# Altium PCB PCB1.PcbDoc
Units mm, origin at the board's own origin, x right, y up, seen from the top; angles counter-clockwise.
Board outline 343.6 x 238.6 mm, 2 copper layers (Top Layer, Bottom Layer); 168 components, 153 nets, 551 pads, 0 vias.
Unrouted connection lines stored in the file: 365.
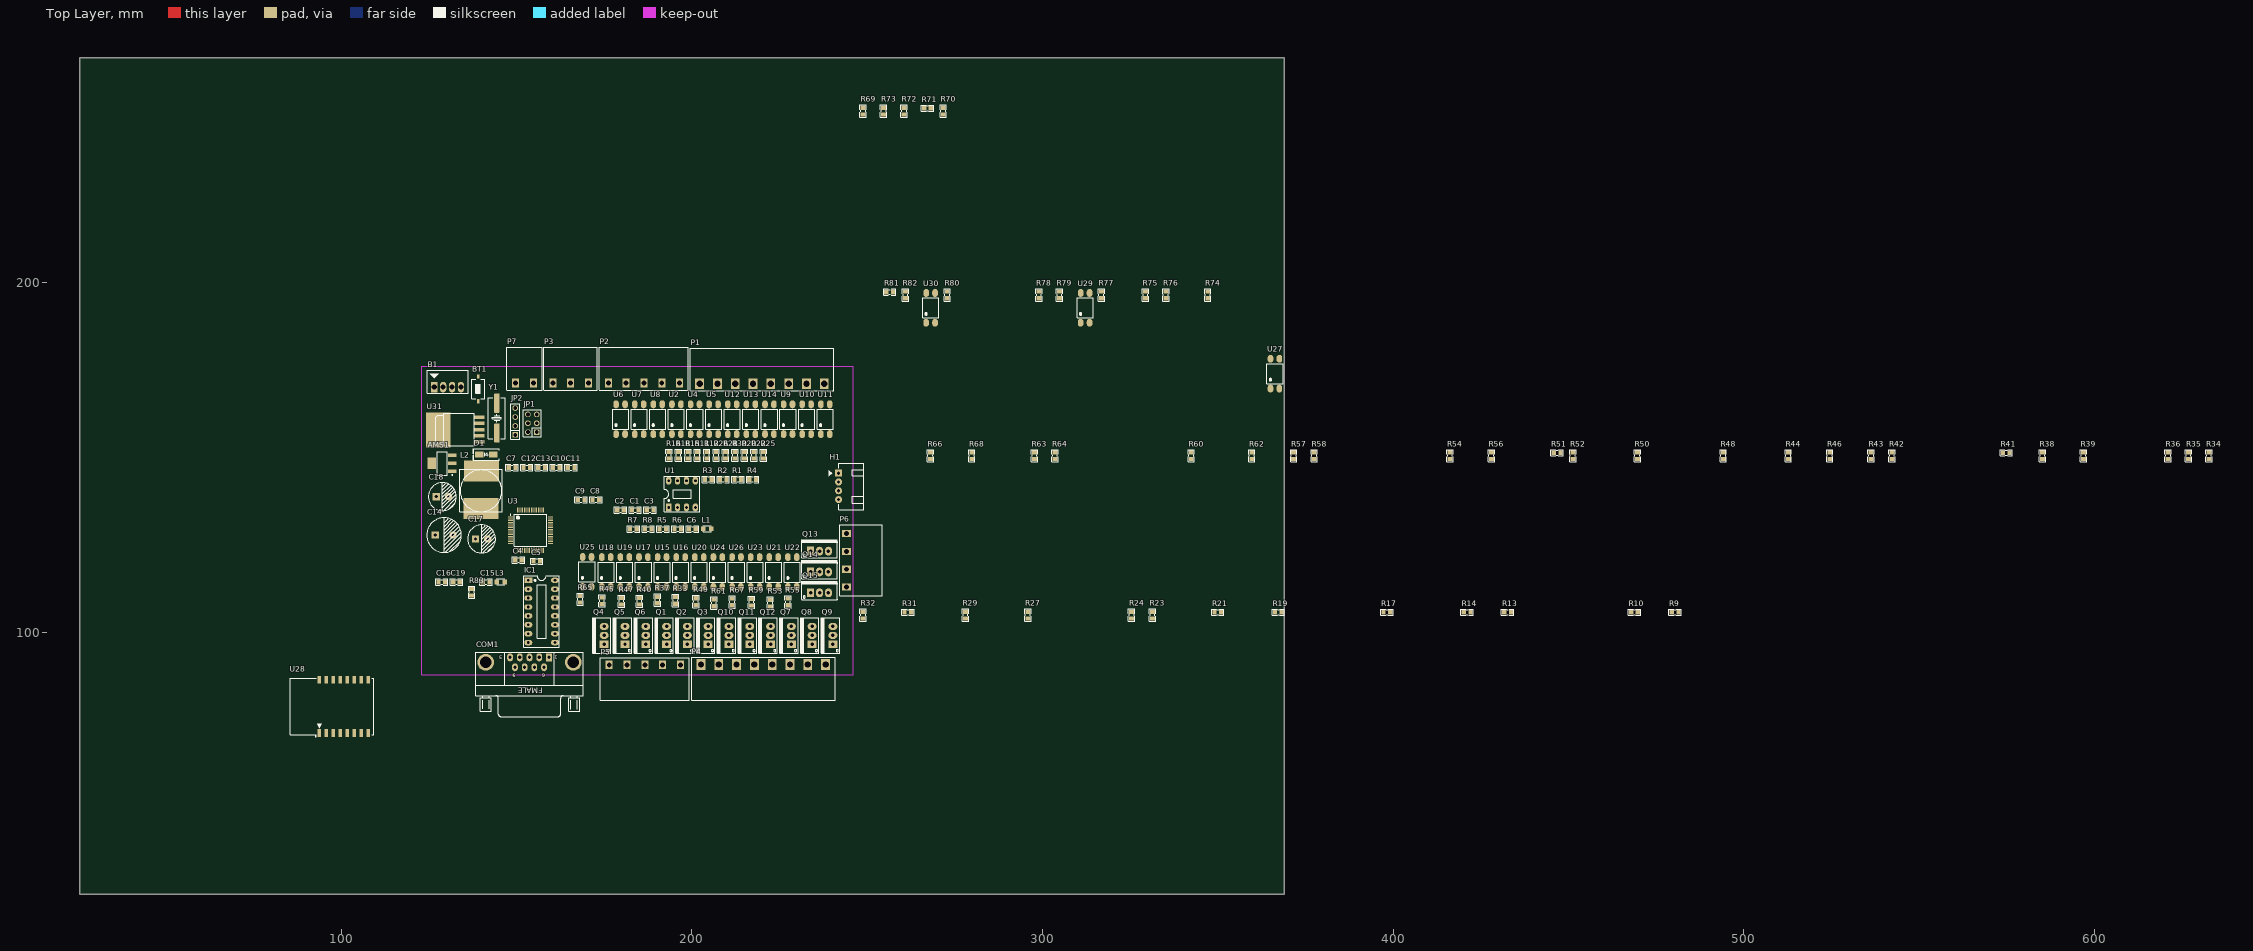
[diagram p0: Top Layer view]
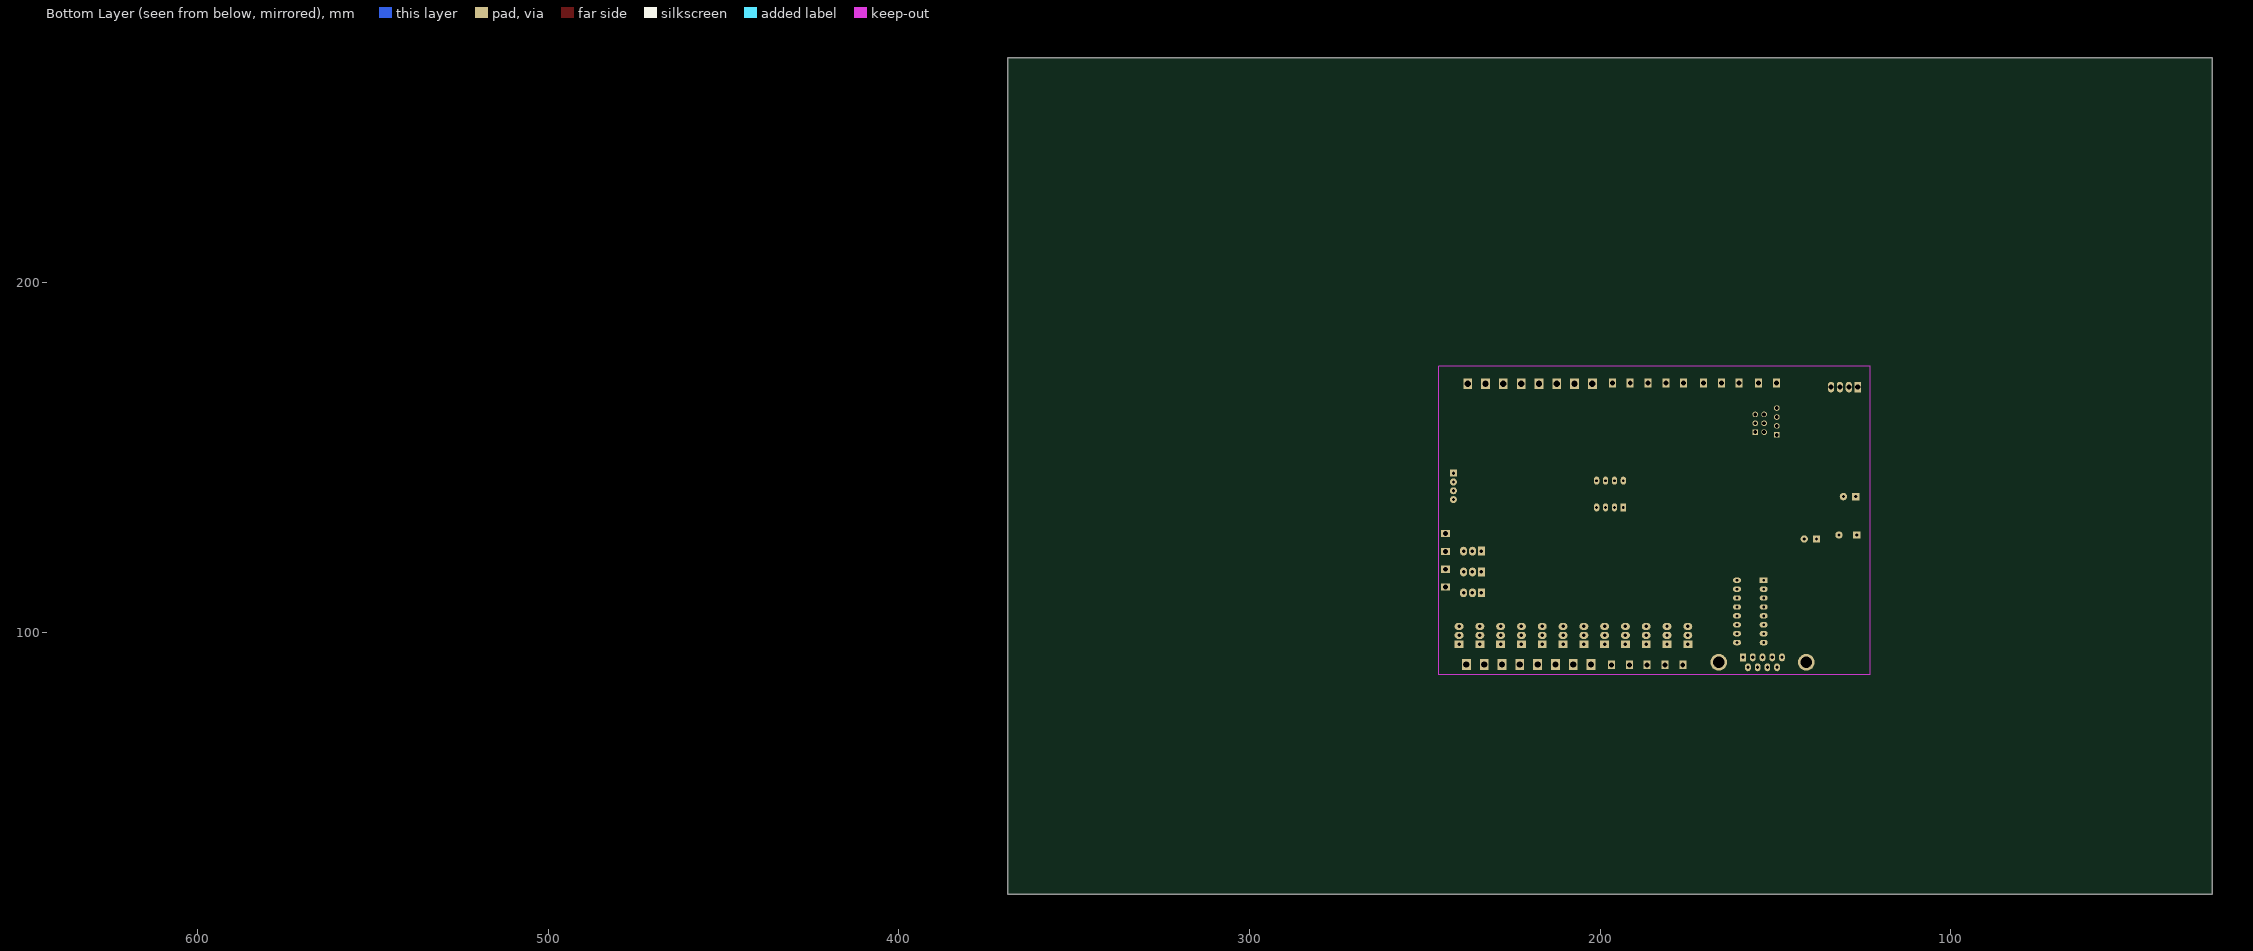
[diagram p1: Bottom Layer view, seen from below]

## Layer stack, top to bottom
Top Solder: solder mask 0.0102, Solder Resist, Dk 3.5
Top Layer: signal copper 0.0356
Dielectric 1: dielectric 0.32, FR-4, Dk 4.8
Bottom Layer: signal copper 0.0356
Bottom Solder: solder mask 0.0102, Solder Resist, Dk 3.5

## Board outline
25.4,25.4 369,25.4 369,264 25.4,264

## Design rules (kind name [scope] priority, off if disabled: settings)
Clearance [All] p1: gap=0.254 ignorepadtopadclearanceinfootprint=FALSE except(0: Arc-Hole Track-Hole SMDPad-Hole THPad-Hole Via-Hole Fill-Hole Poly-Hole Region-Hole Text-Hole)
PolygonConnect [All] p1: connectstyle=Relief reliefconductorwidth=0.254 reliefentries=4 polygonreliefangle="90 Angle" airgapwidth=0.254
RoutingVias [All] p1: holewidth=0.711 width=1.27 viastyle="Through Hole" minholewidth=0.711 minwidth=1.27 maxholewidth=0.711 maxwidth=1.27
SolderMaskExpansion [All] p1: expansion=0.102 istentingtop=FALSE
Width [All] p1: maxlimit=0.254 minlimit=0.254 preferedwidth=0.254
30 further rules are at their usual default settings.

## Classes and differential pairs
component class U_WIFI: R69 R70 R71 R72 R73 U28
component class U_RS485: C6 H1 L1 R1 R2 R3 R4 R5 R6 R7 R8 U1
component class U_RS232: C1 C2 C3 C4 C5 COM1 IC1
component class U_PWM_Output: P6 Q13 Q14 Q15 R74 R75 R76 R77 R78 R79 R80 R81 R82 U27 U29 U30
component class U_Power: AMS1 B1 C14 C15 C16 C17 C18 C19 D1 L2 L3 P7 R83 U31
component class U_D_Output: P4 P5 Q1 Q2 Q3 Q4 Q5 Q6 Q7 Q8 Q9 Q10 Q11 Q12 R33 R34 R35 R36 R37 R38 R39 R40 R41 R42 R43 R44 R45 R46 R47 R48 R49 R50 R51 R52 R53 R54 R55 R56 R57 R58 R59 R60 R61 R62 R63 R64 R65 R66 R67 R68 U15 U16 U17 U18 U19 U20 U21 U22 U23 U24 U25 U26
component class U_D_Input: P1 P2 R9 R10 R11 R12 R13 R14 R15 R16 R17 R18 R19 R20 R21 R22 R23 R24 R25 R26 R27 R28 R29 R30 R31 R32 U2 U4 U5 U6 U7 U8 U9 U10 U11 U12 U13 U14
component class U_A_Input: P3
component class SCH_PLC_Hieu: BT1 C7 C8 C9 C10 C11 C12 C13 JP1 JP2 U3 Y1

## Components (designator, comment, footprint, x,y, rotation, side; value= is the part's Value field where it differs from the comment)
AMS1 "AMS1117-3.3V" SOT223 128.757,148.311 r90 top value="AMS1117-3.3V SOT223"
B1 "B0505S" B0505S 126.517,170.053 r0 top
BT1 "Nut Nhan 2 Chan SMD 3x6x2.5" "Nut Nhan 2 Chan SMD 3x6x2.5" 139.04,169.545 r270 top
C1 "104" "tu 0805" 183.85,135.028 r0 top
C2 "104" "tu 0805" 179.637,135.028 r0 top
C3 "104" "tu 0805" 188.063,135.028 r0 top
C4 "104" "tu 0805" 150.546,120.752 r180 top
C5 "104" "tu 0805" 155.747,120.393 r180 top
C6 "104" "tu 0805" 200.168,129.605 r0 top
C7 "22pF" "tu 0805" 148.695,147.092 r0 top
C8 "104" "tu 0805" 172.613,137.928 r0 top
C9 "104" "tu 0805" 168.399,137.928 r0 top
C10 "104" "tu 0805" 161.335,147.092 r0 top
C11 "104" "tu 0805" 165.548,147.092 r0 top
C12 "104" "tu 0805" 152.909,147.092 r0 top
C13 "22pF" "tu 0805" 157.122,147.092 r0 top
C14 "470uF" "tu hoa 10mm" 129.337,127.864 r0 top
C15 "104" "tu 0805" 141.29,114.461 r0 top
C16 "104" "tu 0805" 128.651,114.461 r0 top
C17 "470uF" "tu hoa 8mm" 140.03,126.746 r0 top
C18 "470uF" "tu hoa 8mm" 128.854,138.811 r0 top
C19 "104" "tu 0805" 132.864,114.461 r0 top
COM1 "COM 9 FMALE" "DSB 9-F" 153.685,91.565 r180 top value="COM 9"
D1 "SS34" "DIODE SMA" 141.351,150.825 r180 top
H1 "Header 4P 2.54 Duc Cong" "Header 4P DC 2.54" 241.884,145.466 r0 top
IC1 "MAX232" DIP16/W0.3 153.34,114.96 r270 top
JP1 "JP 2x3 2.54" "JP 2x3 DT" 154.483,159.741 r90 top
JP2 "JP 1x4 2.54" "JP 1x4 DT" 149.606,156.439 r90 top
L1 "LED 0805" LED-0805-Yellow 203.265,129.654 r0 top
L2 "100uH - 3A SMD" "Cuon Cam 12x12x10" 133.852,134.484 r0 top
L3 "LED 0805" LED-0805-Orange 144.387,114.51 r0 top
P1 "CON 8 EDG5.08" "CON 8 8EDG5.08" 219.989,171.018 r0 top
P2 "CON 5 EDG5.08" "CON 5 5EDG5.08" 176.174,171.247 r0 top
P3 "CON 3 EDG5.08" "CON 3 3EDG5.08" 160.35,171.247 r0 top
P4 "CON 8 EDG5.08" "CON 8 8EDG5.08" 220.37,90.932 r180 top
P5 "CON 5 EDG5.08" "CON 5 5EDG5.08" 196.748,90.83 r180 top
P6 "CON 4 EDG5.08" "CON 4 4EDG5.08" 244.145,128.27 r270 top
P7 "CON 2 EDG5.08" "CON 2 2EDG5.08" 149.733,171.247 r0 top
Q1 "IRFZ44" TO220 192.786,96.71 r90 top
Q2 "IRFZ44" TO220 198.717,96.71 r90 top
Q3 "IRFZ44" TO220 204.648,96.71 r90 top
Q4 "IRFZ44" TO220 174.993,96.71 r90 top
Q5 "IRFZ44" TO220 180.924,96.71 r90 top
Q6 "IRFZ44" TO220 186.855,96.71 r90 top
Q7 "IRFZ44" TO220 228.371,96.71 r90 top
Q8 "IRFZ44" TO220 234.302,96.71 r90 top
Q9 "IRFZ44" TO220 240.233,96.71 r90 top
Q10 "IRFZ44" TO220 210.579,96.71 r90 top
Q11 "IRFZ44" TO220 216.51,96.71 r90 top
Q12 "IRFZ44" TO220 222.44,96.71 r90 top
Q13 "IRFZ44" TO220 233.87,123.253 r0 top
Q14 "IRFZ44" TO220 233.87,117.323 r0 top
Q15 "IRFZ44" TO220 233.87,111.392 r0 top
R1 "10k" "tro smd 0805" 213.133,143.791 r0 top
R2 "10k" "tro smd 0805" 208.925,143.791 r0 top
R3 "10k" "tro smd 0805" 204.717,143.791 r0 top
R4 "10k" "tro smd 0805" 217.341,143.791 r0 top
R5 "20k" "tro smd 0805" 191.749,129.656 r0 top
R6 "120R" "tro smd 0805" 195.957,129.656 r0 top
R7 "20k" "tro smd 0805" 183.333,129.656 r0 top
R8 "1k" "tro smd 0805" 187.541,129.656 r0 top
R9 "10k" "tro smd 0805" 480.441,105.918 r0 top
R10 "10k" "tro smd 0805" 468.884,105.918 r0 top
R11 "10k" "tro smd 0805" 201.615,150.616 r270 top
R12 "10k" "tro smd 0805" 204.309,150.616 r270 top
R13 "10k" "tro smd 0805" 432.689,105.918 r0 top
R14 "10k" "tro smd 0805" 421.132,105.918 r0 top
R15 "10k" "tro smd 0805" 198.921,150.616 r270 top
R16 "10k" "tro smd 0805" 193.533,150.616 r270 top
R17 "10k" "tro smd 0805" 398.272,105.918 r0 top
R18 "10k" "tro smd 0805" 196.227,150.616 r270 top
R19 "10k" "tro smd 0805" 367.284,105.918 r0 top
R20 "10k" "tro smd 0805" 215.085,150.616 r270 top
R21 "10k" "tro smd 0805" 350.012,105.918 r0 top
R22 "10k" "tro smd 0805" 217.78,150.616 r270 top
R23 "10k" "tro smd 0805" 331.343,105.029 r90 top
R24 "10k" "tro smd 0805" 325.374,105.029 r90 top
R25 "10k" "tro smd 0805" 220.474,150.616 r270 top
R26 "10k" "tro smd 0805" 207.003,150.616 r270 top
R27 "10k" "tro smd 0805" 295.783,105.029 r90 top
R28 "10k" "tro smd 0805" 209.697,150.616 r270 top
R29 "10k" "tro smd 0805" 278.003,105.029 r90 top
R30 "10k" "tro smd 0805" 212.391,150.616 r270 top
R31 "10k" "tro smd 0805" 261.62,105.918 r0 top
R32 "10k" "tro smd 0805" 248.793,105.029 r90 top
R33 "680R" "tro smd 0805" 195.291,109.2 r90 top
R34 "10k" "tro smd 0805" 632.714,150.495 r90 top
R35 "10k" "tro smd 0805" 626.872,150.495 r90 top
R36 "10k" "tro smd 0805" 621.03,150.495 r90 top
R37 "680R" "tro smd 0805" 190.144,109.322 r90 top
R38 "100R" "tro smd 0805" 585.216,150.495 r90 top
R39 "100R" "tro smd 0805" 596.9,150.495 r90 top
R40 "680R" "tro smd 0805" 184.988,108.966 r90 top
R41 "100R" "tro smd 0805" 574.929,151.384 r0 top
R42 "10k" "tro smd 0805" 542.29,150.495 r90 top
R43 "10k" "tro smd 0805" 536.321,150.495 r90 top
R44 "10k" "tro smd 0805" 512.699,150.495 r90 top
R45 "680R" "tro smd 0805" 174.31,109.099 r90 top
R46 "100R" "tro smd 0805" 524.51,150.495 r90 top
R47 "680R" "tro smd 0805" 179.873,108.997 r90 top
R48 "100R" "tro smd 0805" 494.157,150.495 r90 top
R49 "680R" "tro smd 0805" 201.133,108.87 r90 top
R50 "100R" "tro smd 0805" 469.646,150.495 r90 top
R51 "10k" "tro smd 0805" 446.786,151.384 r0 top
R52 "10k" "tro smd 0805" 451.231,150.495 r90 top
R53 "680R" "tro smd 0805" 222.316,108.438 r90 top
R54 "100R" "tro smd 0805" 416.179,150.495 r90 top
R55 "680R" "tro smd 0805" 227.345,108.794 r90 top
R56 "100R" "tro smd 0805" 427.99,150.495 r90 top
R57 "10k" "tro smd 0805" 371.602,150.495 r90 top
R58 "10k" "tro smd 0805" 377.444,150.495 r90 top
R59 "680R" "tro smd 0805" 216.957,108.718 r90 top
R60 "100R" "tro smd 0805" 342.392,150.495 r90 top
R61 "680R" "tro smd 0805" 206.35,108.509 r270 top
R62 "100R" "tro smd 0805" 359.664,150.495 r90 top
R63 "10k" "tro smd 0805" 297.688,150.495 r90 top
R64 "10k" "tro smd 0805" 303.53,150.495 r90 top
R65 "680R" "tro smd 0805" 168.113,109.536 r90 top
R66 "100R" "tro smd 0805" 267.97,150.495 r90 top
R67 "680R" "tro smd 0805" 211.445,108.769 r90 top
R68 "100R" "tro smd 0805" 279.781,150.495 r90 top
R69 "10k" "tro smd 0805" 248.793,248.793 r90 top
R70 "10k" "tro smd 0805" 271.653,248.793 r90 top
R71 "10k" "tro smd 0805" 267.208,249.682 r0 top
R72 "10k" "tro smd 0805" 260.477,248.793 r90 top
R73 "10k" "tro smd 0805" 254.635,248.793 r90 top
R74 "10k" "tro smd 0805" 347.091,196.342 r90 top
R75 "680R" "tro smd 0805" 329.311,196.342 r90 top
R76 "100R" "tro smd 0805" 335.153,196.342 r90 top
R77 "10k" "tro smd 0805" 316.738,196.342 r90 top
R78 "680R" "tro smd 0805" 298.958,196.342 r90 top
R79 "100R" "tro smd 0805" 304.8,196.342 r90 top
R80 "10k" "tro smd 0805" 272.796,196.342 r90 top
R81 "680R" "tro smd 0805" 256.413,197.231 r0 top
R82 "100R" "tro smd 0805" 260.858,196.342 r90 top
R83 "220R" "tro smd 0805" 137.125,111.563 r90 top
U1 "max485_smd" DIP8/W0.3 193.38,135.75 r0 top
U2 "OPTO PC817 SMD" SOP4 195.591,160.893 r90 top value=PC817
U3 "STM32F103xx_LQFP64" STM32_LQFP64 153.975,129.235 r0 top
U4 "OPTO PC817 SMD" SOP4 200.899,160.893 r90 top value=PC817
U5 "OPTO PC817 SMD" SOP4 206.207,160.893 r90 top value=PC817
U6 "OPTO PC817 SMD" SOP4 179.667,160.893 r90 top value=PC817
U7 "OPTO PC817 SMD" SOP4 184.975,160.893 r90 top value=PC817
U8 "OPTO PC817 SMD" SOP4 190.283,160.893 r90 top value=PC817
U9 "OPTO PC817 SMD" SOP4 227.439,160.893 r90 top value=PC817
U10 "OPTO PC817 SMD" SOP4 232.747,160.893 r90 top value=PC817
U11 "OPTO PC817 SMD" SOP4 238.055,160.893 r90 top value=PC817
U12 "OPTO PC817 SMD" SOP4 211.515,160.893 r90 top value=PC817
U13 "OPTO PC817 SMD" SOP4 216.823,160.893 r90 top value=PC817
U14 "OPTO PC817 SMD" SOP4 222.131,160.893 r90 top value=PC817
U15 "OPTO PC817 SMD" SOP4 191.501,117.307 r90 top value=PC817
U16 "OPTO PC817 SMD" SOP4 196.809,117.307 r90 top value=PC817
U17 "OPTO PC817 SMD" SOP4 186.193,117.307 r90 top value=PC817
U18 "OPTO PC817 SMD" SOP4 175.577,117.307 r90 top value=PC817
U19 "OPTO PC817 SMD" SOP4 180.885,117.307 r90 top value=PC817
U20 "OPTO PC817 SMD" SOP4 202.117,117.307 r90 top value=PC817
U21 "OPTO PC817 SMD" SOP4 223.349,117.307 r90 top value=PC817
U22 "OPTO PC817 SMD" SOP4 228.657,117.307 r90 top value=PC817
U23 "OPTO PC817 SMD" SOP4 218.041,117.307 r90 top value=PC817
U24 "OPTO PC817 SMD" SOP4 207.425,117.307 r90 top value=PC817
U25 "OPTO PC817 SMD" SOP4 170.104,117.348 r90 top value=PC817
U26 "OPTO PC817 SMD" SOP4 212.733,117.307 r90 top value=PC817
U27 "OPTO PC817 SMD" SOP4 366.319,173.888 r90 top value=PC817
U28 "ESP 07" "ESP8266 07" 93.752,70.964 r90 top
U29 "OPTO PC817 SMD" SOP4 312.166,192.659 r90 top value=PC817
U30 "OPTO PC817 SMD" SOP4 268.097,192.659 r90 top value=PC817
U31 "LM2576HVS 5.0V SMD" TO263-5 133.553,157.963 r90 top
Y1 "8Mhz" "Thach Anh 2 chan SMD" 144.374,161.214 r90 top value=4Mhz

## Footprints (in the part's own frame and the unit in brackets; to place one, negate y for a bottom-side part, rotate by r counter-clockwise, add the part's x,y. Pads: shape width x height; smd on the part's side, far side on the other; paste and mask are expansions set on the pad)
B0505S [mil]
  rect 70x120 hole 57: 1(0,0)
  oval 70x120 hole 57: 2(100,0) 3(200,0) 4(300,0)
  silkscreen extent -80,-70 380,190, body extent -76,-50 376,186, height 394
"CON 2 2EDG5.08" [mm]
  rect 2x2.5 hole 1.4: 1(0,0) 2(5.08,0)
  silkscreen extent -2.54,-2.03 7.62,10.21, body extent -2.5,-1.75 7.58,10.25, height 3.15
"CON 3 3EDG5.08" [mm]
  rect 2x2.5 hole 1.4: 1(0,0) 2(5.08,0) 3(10.173,0)
  silkscreen extent -2.54,-2.03 12.71,10.16, body extent -2.5,-1.75 12.67,10.25, height 3.15
"CON 4 4EDG5.08" [mm]
  rect 2x2.5 hole 1.4: 1(0,0) 1(0,0) 2(5.08,0) 2(5.08,0) 3(10.16,0) 3(10.173,0) 4(15.24,0)
  silkscreen extent -2.54,-2.03 17.78,10.17, body extent -2.5,-1.75 17.74,10.25, height 3.15
"CON 5 5EDG5.08" [mm]
  rect 2x2.5 hole 1.4: 1(0,0) 2(5.08,0) 3(10.16,0) 4(15.24,0) 5(20.32,0)
  silkscreen extent -2.54,-2.03 22.86,10.16, body extent -2.5,-1.75 22.82,10.25, height 3.15
"CON 8 8EDG5.08" [mm]
  rect 2.5x3 hole 1.8: 1(-17.78,0) 2(-12.7,0) 3(-7.62,0) 4(-2.54,0) 5(2.54,0) 6(7.62,0) 7(12.7,0) 8(17.78,0)
  silkscreen extent -20.48,-2.03 20.48,10.16, body extent -20.28,-1.75 20.28,10.25, height 3.15
"Cuon Cam 12x12x10" [mm] "Cuon Cam 12x12x10"
  rect 10x6 smd: 1(6.1,11.6) 2(6,1)
  silkscreen extent 0,0 12.1,12.1, body extent 0.1,-0.2 12.1,12.14, height 7.51
"DIODE SMA" [mm] "SMA"
  rect 2.5x1.7 smd: 1(-2,0) 2(2,0)
  silkscreen extent -3.68,-1.65 3.75,1.65, body extent -2.6,-1.37 2.6,1.37, height 2.4
DIP8/W0.3 [mil] "8 PIN, W 300mil, Pin to pin 100mil"
  rect 60x90 hole 31: 1(0,0)
  oval 60x90 hole 31: 2(100,0) 3(200,0) 4(300,0) 5(300,300) 6(200,300) 7(100,300) 8(0,300)
  silkscreen extent -50,-50 350,350, body extent -50,-40 350,336, height 201
DIP16/W0.3 [mil] "16 PIN, W 300mil, Pin to pin 100mil"
  rect 60x90 hole 31: 1(0,0)
  oval 60x90 hole 31: 2(100,0) 3(200,0) 4(300,0) 5(400,0) 6(500,0) 7(600,0) 8(700,0) 9(700,300) 10(600,300) 11(500,300) 12(400,300) 13(300,300) 14(200,300) 15(100,300) 16(0,300)
  silkscreen extent -50,-50 750,350, body extent -52,-57 752,356, height 299
"DSB 9-F" [mil] "COM FMALE - D Subminiature; 9 Position; Right Angle; Pitch 1.385 mm"
  rect 65x90 hole 35: 1(-218.11,-55.91)
  oval 65x90 hole 35: 2(-109.06,-55.91) 3(0,-55.91) 4(109.05,-55.91) 5(218.11,-55.91) 6(-163.58,55.91) 7(-54.53,55.91) 8(54.53,55.91) 9(163.58,55.91)
  round 187.4 hole 128.35: 10(-491.93,0) 11(491.93,0)
  silkscreen extent -606,-114 606,610, body extent -604,-138 608,613, height 495
"ESP8266 07" [mm] "ESP-12 Wi-Fi Module by AI-Thinker"
  rect 2.25x1 smd: 1(0.375,0) 2(0.375,-2) 3(0.375,-4) 4(0.375,-6) 5(0.375,-8) 6(0.375,-10) 7(0.375,-12) 8(0.375,-14) 9(15.625,-14) 10(15.625,-12) 11(15.625,-10) 12(15.625,-8) 13(15.625,-6) 14(15.625,-4) 15(15.625,-2) 16(15.625,0)
  silkscreen extent -0.7,-15.57 16.08,8.37, body extent 0,-15.49 16,8.51, height 2.75
"Header 4P DC 2.54" [mil]
  rect 78.74x78.74 hole 35: 1(-1,1)
  round 78.74 hole 35: 2(-1,-97.43) 3(-1,-195.85) 4(-1,-294.28)
  silkscreen extent -110,-409 280,115, body extent 5,-413 278,123, height 290
"JP 1x4 DT" [mm] "4 pins, 1 row, straight, gold plating"
  rect 1.6x1.6 hole 1.1: 1(0,0)
  round 1.6 hole 1.1: 2(2.54,0) 3(5.08,0) 4(7.62,0)
  silkscreen extent -1.27,-1.27 8.89,1.27, body extent -1.27,-1.27 8.89,1.27, height 8.54
"JP 2x3 DT" [mm]
  rect 1.6x1.6 hole 1.1: 1(-2.54,-1.27)
  round 1.6 hole 1.1: 2(0,-1.27) 3(2.54,-1.27) 4(2.54,1.27) 5(0,1.27) 6(-2.54,1.27)
  silkscreen extent -3.81,-2.54 3.81,2.54, body extent -3.81,-2.54 3.81,2.54, height 8.55
LED-0805-Orange [mil]
  rect 50x55 smd: 1(0,0) 2(90,0)
  silkscreen extent 0,-35 90,35, body extent 5,-25 85,25, height 43
LED-0805-Yellow [mil]
  rect 50x55 smd: 1(0,0) 2(90,0)
  silkscreen extent 0,-35 90,35, body extent 5,-25 85,25, height 43
"Nut Nhan 2 Chan SMD 3x6x2.5" [mm] "Switch SMD type"
  rect 1.2x0.8 smd: 1(-3.5,0) 2(3.5,0)
  silkscreen extent -2.82,-1.85 2.82,1.85, body extent -3.05,-1.85 3.05,1.85, height 2.5
SOP4 [mm]
  oval 2.25x1.6 smd: 1(-4.25,1.27) 2(-4.25,-1.27) 3(4.25,-1.27) 4(4.25,1.27)
  silkscreen extent -2.85,-2.3 2.85,2.3, body extent -4.67,-2.29 4.93,2.31, height 3.6
SOT223 [mm]
  rect 1x2.4 smd: 1(-2.3,-2.9) 2(0,-2.9) 3(2.3,-2.9)
  rect 3.3x2.4 smd: 4(0,2.9)
  silkscreen extent -3.47,-3.03 3.35,1.4, body extent -3.25,-3.56 3.25,3.4, height 1.68
STM32_LQFP64 [mm] "TSQFP, 64-Leads, Body 10.00x10.00mm, Pitch 0.50mm, IPC Medium Density"
  oval 1.45x0.3 smd: 1(-5.725,3.75) 2(-5.725,3.25) 3(-5.725,2.75) 4(-5.725,2.25) 5(-5.725,1.75) 6(-5.725,1.25) 7(-5.725,0.75) 8(-5.725,0.25) 9(-5.725,-0.25) 10(-5.725,-0.75) 11(-5.725,-1.25) 12(-5.725,-1.75) 13(-5.725,-2.25) 14(-5.725,-2.75) 15(-5.725,-3.25) 16(-5.725,-3.75) 33(5.725,-3.75) 34(5.725,-3.25) 35(5.725,-2.75) 36(5.725,-2.25) 37(5.725,-1.75) 38(5.725,-1.25) 39(5.725,-0.75) 40(5.725,-0.25) 41(5.725,0.25) 42(5.725,0.75) 43(5.725,1.25) 44(5.725,1.75) 45(5.725,2.25) 46(5.725,2.75) 47(5.725,3.25) 48(5.725,3.75)
  oval 0.3x1.45 smd: 17(-3.75,-5.725) 18(-3.25,-5.725) 19(-2.75,-5.725) 20(-2.25,-5.725) 21(-1.75,-5.725) 22(-1.25,-5.725) 23(-0.75,-5.725) 24(-0.25,-5.725) 25(0.25,-5.725) 26(0.75,-5.725) 27(1.25,-5.725) 28(1.75,-5.725) 29(2.25,-5.725) 30(2.75,-5.725) 31(3.25,-5.725) 32(3.75,-5.725) 49(3.75,5.725) 50(3.25,5.725) 51(2.75,5.725) 52(2.25,5.725) 53(1.75,5.725) 54(1.25,5.725) 55(0.75,5.725) 56(0.25,5.725) 57(-0.25,5.725) 58(-0.75,5.725) 59(-1.25,5.725) 60(-1.75,5.725) 61(-2.25,5.725) 62(-2.75,5.725) 63(-3.25,5.725) 64(-3.75,5.725)
  silkscreen extent -5.85,-4.6 4.6,4.6, body extent -6,-6 6,6, height 1.6
"Thach Anh 2 chan SMD" [mm] "SMD Crystal HC49/US-SM package"
  round 0.508 on Mech15: 0(0,0)
  rrect25% 5.5x1.5 smd: 1(-4.25,0) 2(4.25,0)
  silkscreen extent -5.84,-2.41 5.84,2.41, body extent -6.4,-2.41 6.4,2.42, height 4.29
TO220 [mil] "TO-220"
  rect 80x100 hole 39: 1(0,0)
  oval 80x100 hole 39: 2(100,0) 3(200,0)
  silkscreen extent -100,-76 300,130, body extent -95,-80 295,97, height 323
TO263-5 [mil] "TO263-5"
  rect 39.37x120 smd: 1(-140,-230) 2(-70,-230) 3(0,-230) 4(70,-230) 5(140,-230)
  rect 393.7x275.59 smd: 6(-5,230)
  silkscreen extent -180,-170 180,260, body extent -200,-242 200,310, height 180
"tro smd 0805" [mm]
  rect 1.2x1.4 smd: 1(-0.946,-0.061) 2(0.954,-0.061)
  silkscreen extent -1.75,-0.97 1.75,0.84, body extent -1.56,-0.76 1.44,0.64, height 0.53
"tu 0805" [mm] "Compoment SMD 80x50mil"
  rect 1.2x1.4 smd: 1(-0.946,-0.003) 2(0.954,-0.003)
  silkscreen extent -1.75,-0.89 1.75,0.89, body extent -1.01,-0.64 1.01,0.63, height 0.61
"tu hoa 8mm" [mm]
  rect 2.1x2.1 hole 0.9: 1(-1.75,0)
  round 2.1 hole 0.9: 2(1.75,0)
  silkscreen extent -4,-4 4,4, body extent -4.1,-4.07 4.1,4.13, height 13.81
"tu hoa 10mm" [mm]
  rect 2.1x2.1 hole 0.9: 1(-2.54,0)
  round 2.1 hole 0.9: 2(2.54,0)
  silkscreen extent -4.95,-4.96 4.93,4.92, body extent -5,-5 4.97,5, height 20.01

## Part data
AMS1: library part "AMS1117 SMD", "Dán", Chung_Loai=Dán, Don_Vi=Con, Ma_Hang=MH000596
B1 H1 P1 P2 P3 P4 P5 P6 P7: "Cắm", Chung_Loai=Cắm, Don_Vi=Con
  B1: Ma_Hang=MH003143, Ten_Linh_Kien="B0505S-1W SIP4 IC Converter DC-DC"
  H1: Ma_Hang=MH001310, Ten_Linh_Kien="Header 4P XH2.54-4P Đực Cong"
  P1 P4: Ma_Hang=MH000978, Ten_Linh_Kien="CON 8 2EDG5.08-8P 5.08MM ( Xanh Cong)"
  P2 P5: Ma_Hang=MH003589, Ten_Linh_Kien="CON 5 2EDG5.08-5P 5.08MM ( Xanh Cong)"
  P3: Ma_Hang=MH000760, Ten_Linh_Kien="CON 3 2EDG5.08-3P 5.08MM ( Xanh Cong)"
  P6: Ma_Hang=MH000979, Ten_Linh_Kien="CON 4 2EDG5.08-4P 5.08MM ( Xanh Cong)"
  P7: Ma_Hang=MH000759, Ten_Linh_Kien="CON 2 2EDG5.08-2P 5.08MM ( Xanh Cong)"
C1 C2 C3 C4 C5 C6 C8 C9 C10 C11 C12 C15 C16 C19: library part "Tu 0805 104 50V 10%", "Dán", Chung_Loai=Dán, Don_Vi=Con, Ma_Hang=MH004551, So_Chan=2, Ten_Linh_Kien="Tụ 0805 104-100nF 10% 50V"
C7 C13: library part "Tu 0805 22pF 50V 10%", "Dán", Chung_Loai=Dán, Don_Vi=Con, Ma_Hang=MH004560, So_Chan=2, Ten_Linh_Kien="Tụ 0805 22P 10% 50V"
C14: library part "Tu Hoa 470uF 50V 10x17", "Cắm", Chung_Loai=Cắm, Don_Vi=Con, Ma_Hang=MH006866, So_Chan=2, Ten_Linh_Kien="Tụ Hóa 470uF 50V"
C17 C18: library part "Tu Hoa 470uF 16V 8x11", "Cắm", Chung_Loai=Cắm, Don_Vi=Con, Ma_Hang=MH006550, So_Chan=2, Ten_Linh_Kien="Tụ Hóa 470uF 16V 8x11MM"
COM1: library part DSB9F, "COM 9", PackageDocument=O, DatasheetDocument=1-Sep-1999, Gender=Receptacle, LatestRevisionDate=17-Jul-2002, LatestRevisionNote="Re-released for DXP Platform.", Orientation="Right Angle", PackageReference=788750, Positions=9, Published=15-Jun-2001, Publisher="Altium Limited"
D1: library part "Diode SS34 ( 1N5822 )", "Dán", Chung_Loai=Dán, Don_Vi=Con, Ma_Hang=MH002104, Ten_Linh_Kien="Diode SS34 3A 40V SMA ( 1N5822 SS34A)"
IC1: "Dual EIA-232 Driver/Receiver"
JP1: library part "JP 2x3 2.54 Duc Thang", "Cắm", Chung_Loai=Cắm, Don_Vi=Con, Ma_Hang=MH002686, Ten_Linh_Kien="Jump Đôi Đực 2.54MM 2x40P Thẳng 11MM"
JP2: library part "JP 1x4 2.54 Duc Thang", "Cắm", Chung_Loai=Cắm, Don_Vi=Con, Ma_Hang=MH000903, Ten_Linh_Kien="Jump Đơn Đực 2.54MM 1x40P Thẳng 11MM"
L1: library part "LED 0805 Vang", "Dán", Chung_Loai=Dán, Don_Vi=Con, Ma_Hang=MH002329, Ten_Linh_Kien="LED 0805 Màu Vàng ( Yellow)"
L2: library part "CUON CAM 100uH SMD", "Dán", Chung_Loai=Dán, Don_Vi=Con, Ten_Linh_Kien="Cuộn Cảm 100uH 7x7x4MM CD74"
L3: library part "LED 0805 Cam", "Dán", Chung_Loai=Dán, Don_Vi=Con, Ma_Hang=MH002328, Ten_Linh_Kien="LED 0805 Màu Cam ( Orange)"
Q1 Q2 Q3 Q4 Q5 Q6 Q7 Q8 Q9 Q10 Q11 Q12 Q13 Q14 Q15: library part "IRFZ44 DIP", "N-Channel Power MOSFET"
R1 R2 R3 R4 R9 R10 R11 R12 R13 R14 R15 R16 R17 R18 R19 R20 R21 R22 R23 R24 R25 R26 R27 R28 R29 R30 R31 R32 R34 R35 R36 R42 R43 R44 R51 R52 R57 R58 R63 R64 R69 R70 R71 R72 R73 R74 R77 R80: library part "Tro 0805 1% 10k", "Dán", Chung_Loai=Dán, Don_Vi=Con, Ma_Hang=MH005473, So_Chan=2, Ten_Linh_Kien="Trở 0805 1% 10k"
R5 R7: library part "Tro 0805 5% 20k", "Dán", Chung_Loai=Dán, Don_Vi=Con, Ma_Hang=MH005247, So_Chan=2, Ten_Linh_Kien="Trở 0805 5% 20k"
R6: library part "Tro 0805 5% 120R", "Dán", Chung_Loai=Dán, Don_Vi=Con, Ma_Hang=MH005253, So_Chan=2, Ten_Linh_Kien="Trở 0805 5% 120R"
R8: library part "Tro 0805 1% 1k", "Dán", Chung_Loai=Dán, Don_Vi=Con, Ma_Hang=MH005468, So_Chan=2, Ten_Linh_Kien="Trở 0805 1% 1k"
R33 R37 R40 R45 R47 R49 R53 R55 R59 R61 R65 R67 R75 R78 R81: library part "Tro 0805 1% 680R", "Dán", Chung_Loai=Dán, Don_Vi=Con, Ma_Hang=MH005487, So_Chan=2, Ten_Linh_Kien="Trở 0805 1% 680R"
R38 R39 R41 R46 R48 R50 R54 R56 R60 R62 R66 R68 R76 R79 R82: library part "Tro 0805 5% 100R", "Dán", Chung_Loai=Dán, Don_Vi=Con, Ma_Hang=MH005251, So_Chan=2, Ten_Linh_Kien="Trở 0805 5% 100R"
R83: library part "Tro 0805 5% 220R", "Dán", Chung_Loai=Dán, Don_Vi=Con, Ma_Hang=MH005259, So_Chan=2, Ten_Linh_Kien="Trở 0805 5% 220R"
U2 U4 U5 U6 U7 U8 U9 U10 U11 U12 U13 U14 U15 U16 U17 U18 U19 U20 U21 U22 U23 U24 U25 U26 U27 U29 U30: "Single Opto"
U28: library part "ESP8266 07", "ESP8266 07 16 Pin", IC=ESP8266-EX, Vendor=Ai-thinker
U31: "Dán", Chung_Loai=Dán, Don_Vi=Con, Ma_Hang=MH002362, Ten_Linh_Kien="LM2576HVS-5.0V BUCK 5V 3A TO263-5"
Y1: library part "Thach Anh 2 chan SMD", "Crystal For all Crystal 2pin."
BT1: Ma_Hang=MH001036, Ten="Nút Nhấn 2 Chân 3x6x2.5MM SMD"

## Nets (pads, with @x,y where several pads share a name; then routed paths per layer and width w, separated by ;. In a path a pad name is that pad's centre, name@x,y a point inside that pad or via, vN(x,y) a via of type N, cw(c..) or ccw(c..) an arc to the next point about the centre after c; other vN are vias at no path point)
3.3V: C3.1 C9.2 C10.2 C11.1 C12.2 IC1.16 JP1.1 JP1.6 JP2.4 P2.5 R9.2 R10.2 R13.2 R14.2 R17.2 R19.2 R21.2 R23.2 R24.2 R27.2 R29.2 R31.2 R69.1 R70.2 R72.2 R73.2 U3.13 U3.19 U3.32 U3.48 U3.64 U28.8
5V: AMS1.3 B1.2 C16.1 C17.1 L2.2 U31.4
5V_CL: B1.4 C6.2 H1.1 P5.5 R1.2 R2.2 R3.2 R4.2 R7.2 R8.2 R34.1 R35.1 R36.1 R42.1 R43.1 R44.1 R51.1 R52.1 R57.1 R58.1 R63.1 R64.1 U1.8
24V: C14.1 C15.2 P6.4 P7.1 R74.1 R77.1 R80.1 U31.1
AI1: P3.3 U3.8
AI2: P3.2 U3.9
AI3: P3.1 U3.10
BOOT0: JP1.5 U3.60
BOOT1: JP1.2 U3.28
COM_RX: COM1.2 IC1.13
COM_TX: COM1.3 IC1.14
D_IN1: R9.1 U2.4 U3.30
D_IN2: R13.1 U3.29 U5.4
D_IN3: R17.1 U3.27 U7.4
D_IN4: R21.1 U3.26 U9.4
D_IN5: R27.1 U3.25 U12.4
D_IN6: R31.1 U3.24 U14.4
D_IN7: R10.1 U3.23 U4.4
D_IN8: R14.1 U3.22 U6.4
D_IN9: R19.1 U3.21 U8.4
D_IN10: R24.1 U3.20 U11.4
D_IN11: R23.1 U3.15 U10.4
D_IN12: R29.1 U3.14 U13.4
D_OUT1: R33.1 U3.45
D_OUT2: R45.1 U3.44
D_OUT3: R55.1 U3.43
D_OUT4: R61.1 U3.42
D_OUT5: R67.1 U3.41
D_OUT6: R40.1 U3.40
D_OUT7: R47.1 U3.39
D_OUT8: R53.1 U3.38
D_OUT9: R59.1 U3.37
D_OUT10: R65.1 U3.36
D_OUT11: R37.1 U3.35
D_OUT12: R49.1 U3.34
DE: R2.1 R3.1 U1.2 U1.3 U3.55
DI1: P1.1 U2.1
DI2: P1.2 U5.1
DI3: P1.3 U7.1
DI4: P1.4 U9.1
DI5: P1.5 U12.1
DI6: P1.6 U14.1
DI7: P1.7 U4.1
DI8: P1.8 U6.1
DI9: P2.1 U8.1
DI10: P2.2 U11.1
DI11: P2.3 U10.1
DI12: P2.4 U13.1
DO1: P4.1 Q1.2
DO2: P4.2 Q4.2
DO3: P4.3 Q8.2
DO4: P4.4 Q10.2
DO5: P4.5 Q12.2
DO6: P4.6 Q3.2
DO7: P4.7 Q5.2
DO8: P4.8 Q7.2
DO9: P5.1 Q9.2
DO10: P5.2 Q11.2
DO11: P5.3 Q2.2
DO12: P5.4 Q6.2
EN: R72.1 U28.3
ESP_NRST: R69.2 U28.1
GND: AMS1.1 B1.1 BT1.1 C3.2 C4.2 C5.2 C6.1 C7.1 C8.2 C9.1 C10.1 C11.2 C12.1 C13.1 C14.2 C15.1 C16.2 C17.2 C18.2 C19.2 COM1.5 D1.1 H1.4 IC1.15 JP1.3 JP1.4 JP2.2 L1.2 L3.2 P7.2 R5.2 R71.1 U1.5 U2.3 U3.12 U3.18 U3.31 U3.47 U3.63 U4.3 U5.3 U6.3 U7.3 U8.3 U9.3 U10.3 U11.3 U12.3 U13.3 U14.3 U15.2 U16.2 U17.2 U18.2 U19.2 U20.2 U21.2 U22.2 U23.2 U24.2 U25.2 U26.2 U27.2 U28.9 U29.2 U30.2 U31.3 U31.5 U31.6
GND_CL: B1.3 Q1.3 Q2.3 Q3.3 Q4.3 Q5.3 Q6.3 Q7.3 Q8.3 Q9.3 Q10.3 Q11.3 Q12.3 Q13.3 Q14.3 Q15.3 R11.1 R12.1 R15.1 R16.1 R18.1 R20.1 R22.1 R25.1 R26.1 R28.1 R30.1 R32.1 U15.3 U16.3 U17.3 U18.3 U19.3 U20.3 U21.3 U22.3 U23.3 U24.3 U25.3 U26.3 U27.3 U29.3 U30.3
GPIO0: R73.1 U28.12
GPIO2: R70.1 U28.11
GPIO15: R71.2 U28.10
MCU_RX1: R1.1 U1.1 U3.54
MCU_RX2: U3.17 U28.16
MCU_RX3: IC1.12 U3.52
MCU_TX1: R4.1 U1.4 U3.53
MCU_TX2: U3.16 U28.15
MCU_TX3: IC1.11 U3.51
NetAMS1_2: AMS1.2 AMS1.4 C18.1 C19.1 R83.1
NetC1_1: C1.1 IC1.1
NetC1_2: C1.2 IC1.3
NetC2_1: C2.1 IC1.4
NetC2_2: C2.2 IC1.5
NetC4_1: C4.1 IC1.6
NetC5_1: C5.1 IC1.2
NetD1_2: D1.2 L2.1 U31.2
NetH1_2: H1.2 R5.1 R6.1 U1.7
NetH1_3: H1.3 R6.2 R7.1 U1.6
NetL1_1: L1.1 R8.1
NetL3_1: L3.1 R83.2
NetQ1_1: Q1.1 R39.2
NetQ2_1: Q2.1 R38.2
NetQ3_1: Q3.1 R41.2
NetQ4_1: Q4.1 R46.2
NetQ5_1: Q5.1 R48.2
NetQ6_1: Q6.1 R50.2
NetQ7_1: Q7.1 R54.2
NetQ8_1: Q8.1 R56.2
NetQ9_1: Q9.1 R60.2
NetQ10_1: Q10.1 R62.2
NetQ11_1: Q11.1 R66.2
NetQ12_1: Q12.1 R68.2
NetQ13_1: Q13.1 R76.2
NetQ14_1: Q14.1 R79.2
NetQ15_1: Q15.1 R82.2
NetR11_2: R11.2 U2.2
NetR12_2: R12.2 U4.2
NetR15_2: R15.2 U5.2
NetR16_2: R16.2 U6.2
NetR18_2: R18.2 U7.2
NetR20_2: R20.2 U8.2
NetR22_2: R22.2 U9.2
NetR25_2: R25.2 U10.2
NetR26_2: R26.2 U11.2
NetR28_2: R28.2 U12.2
NetR30_2: R30.2 U13.2
NetR32_2: R32.2 U14.2
NetR33_2: R33.2 U16.1
NetR34_2: R34.2 R39.1 U16.4
NetR35_2: R35.2 R38.1 U15.4
NetR36_2: R36.2 R41.1 U17.4
NetR37_2: R37.2 U15.1
NetR40_2: R40.2 U17.1
NetR42_2: R42.2 R46.1 U18.4
NetR43_2: R43.2 R48.1 U19.4
NetR44_2: R44.2 R50.1 U20.4
NetR45_2: R45.2 U18.1
NetR47_2: R47.2 U19.1
NetR49_2: R49.2 U20.1
NetR51_2: R51.2 R54.1 U21.4
NetR52_2: R52.2 R56.1 U22.4
NetR53_2: R53.2 U21.1
NetR55_2: R55.2 U22.1
NetR57_2: R57.2 R60.1 U23.4
NetR58_2: R58.2 R62.1 U24.4
NetR59_2: R59.2 U23.1
NetR61_2: R61.2 U24.1
NetR63_2: R63.2 R66.1 U25.4
NetR64_2: R64.2 R68.1 U26.4
NetR65_2: R65.2 U25.1
NetR67_2: R67.2 U26.1
NetR74_2: R74.2 R76.1 U27.4
NetR75_2: R75.2 U27.1
NetR77_2: R77.2 R79.1 U29.4
NetR78_2: R78.2 U29.1
NetR80_2: R80.2 R82.1 U30.4
NetR81_2: R81.2 U30.1
NRST: BT1.2 C8.1 U3.7
OSC1: C7.2 U3.5 Y1.2
OSC2: C13.2 U3.6 Y1.1
PWM1: P6.1 Q13.2
PWM2: P6.2 Q14.2
PWM3: P6.3 Q15.2
PWM_1: R75.1 U3.59
PWM_2: R78.1 U3.58
PWM_3: R81.1 U3.57
SWCLK: JP2.3 U3.49
SWDIO: JP2.1 U3.46
pads on no net: COM1.1 COM1.4 COM1.6 COM1.7 COM1.8 COM1.9 COM1.10 COM1.11 IC1.7 IC1.8 IC1.9 IC1.10 U3.1 U3.2 U3.3 U3.4 U3.11 U3.33 U3.50 U3.56 U3.61 U3.62 U28.2 U28.4 U28.5 U28.6 U28.7 U28.13 U28.14 Y1.0

## Keep-outs
Keep-Out Layer:
  lines w0.254: 123,88 246,88 ; 123,88 246,88 ; 123,88 123,176 ; 123,88 123,176 ; 123,88 246,88 ; 123,176 246,176 ; 123,176 246,176 ; 123,176 246,176 ; 246,88 246,176 ; 246,88 246,176 ; 246,88 246,176

## Text inside footprints (layer, text, board x,y; h text height)
COM1: Top Overlay "FMALE" at 157.495,84.326 h1.52 r180; Top Overlay "6" at 158.13,88.263 h1.02 r180; Top Overlay "9" at 149.748,88.263 h1.02 r180; Top Overlay "5" at 145.938,93.47 h1.02 r180; Top Overlay "1" at 161.686,93.47 h1.02 r180
U28: Mechanical 13 "ANTENNA AREA" at 85.878,71.091 h0.25 r90; Mechanical 13 "CUTOUT POLYGON" at 86.386,71.091 h0.25 r90